# Altium PCB PCB1.PcbDoc
Units mm, origin at the board's own origin, x right, y up, seen from the top; angles counter-clockwise.
Board outline 50 x 50 mm, 2 copper layers (Top Layer, Bottom Layer); 11 components, 10 nets, 36 pads, 0 vias.
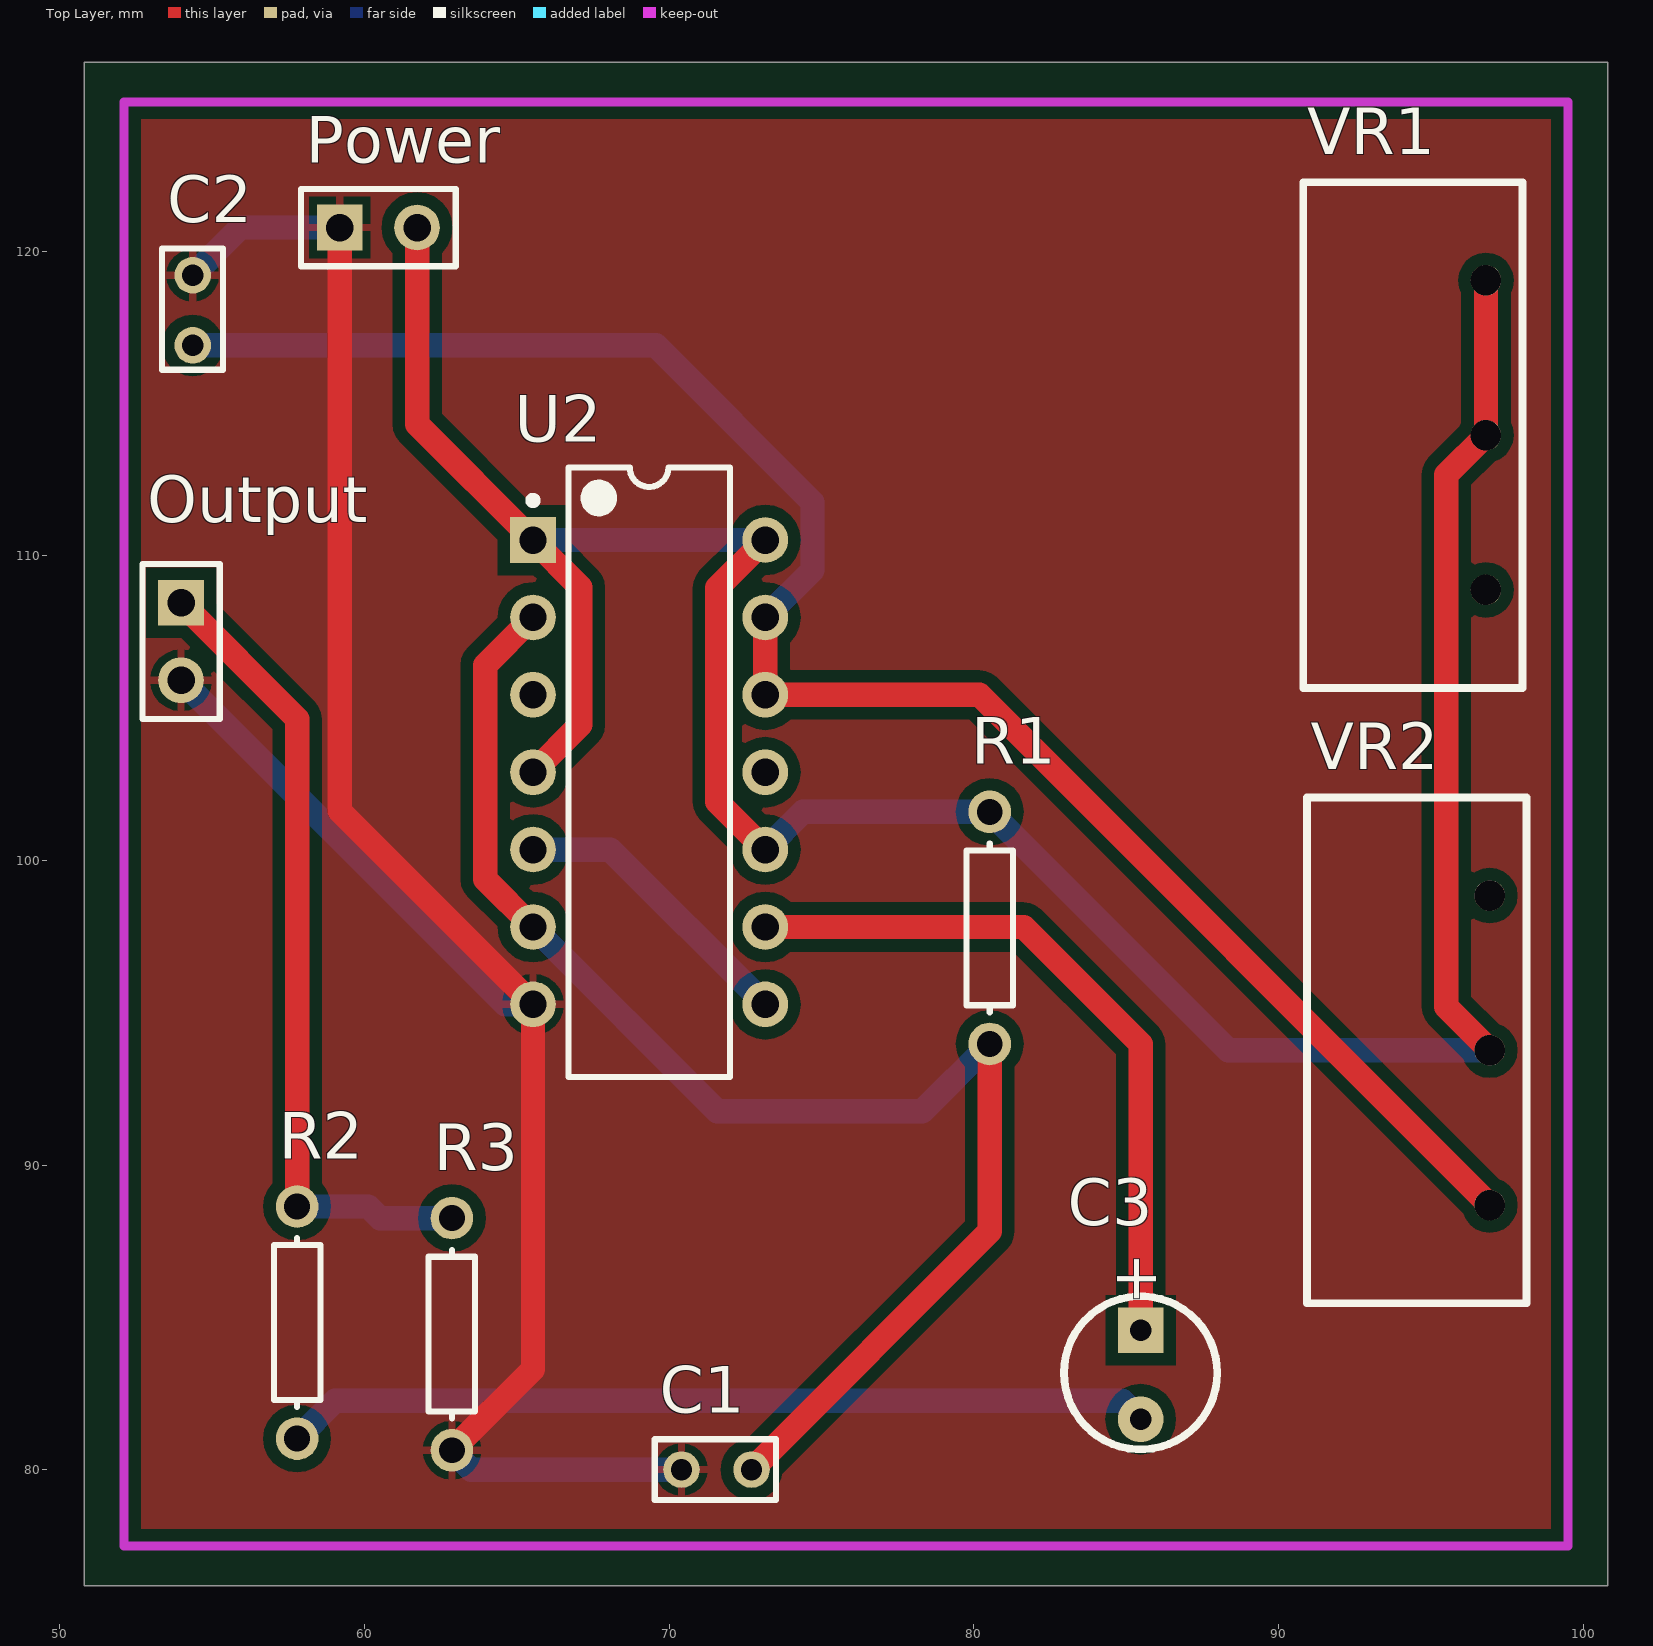
[diagram p0: Top Layer view]
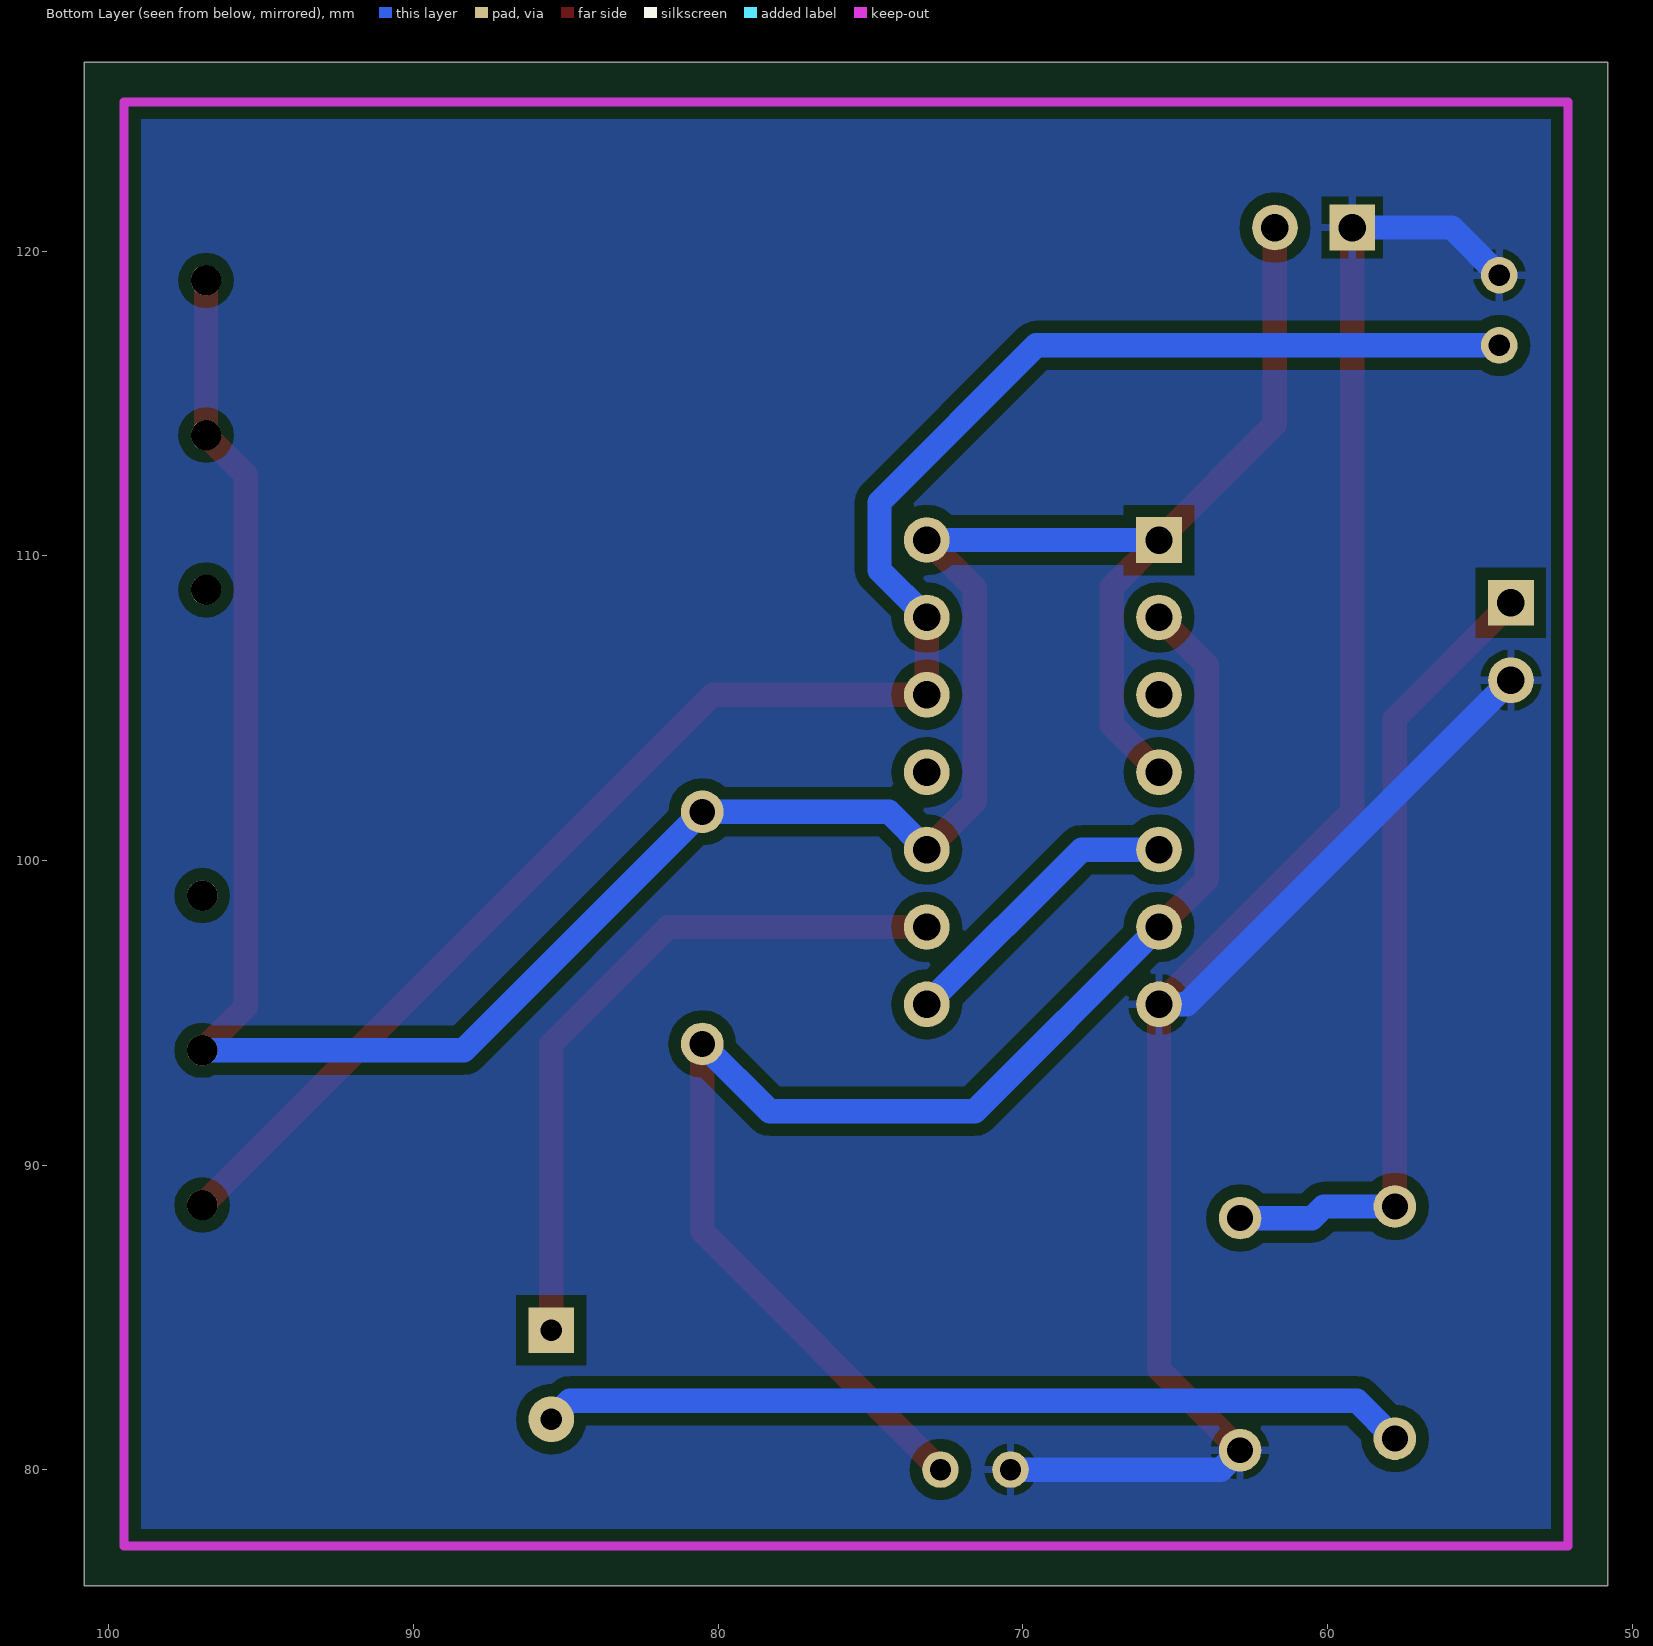
[diagram p1: Bottom Layer view, seen from below]

## Layer stack, top to bottom
Top Solder: solder mask 0.0102, Solder Resist, Dk 3.5
Top Layer: signal copper 0.0356
Dielectric 1: dielectric 0.32, FR-4, Dk 4.8
Bottom Layer: signal copper 0.0356
Bottom Solder: solder mask 0.0102, Solder Resist, Dk 3.5

## Board outline
50.8,76.2 100.8,76.2 100.8,126.2 50.8,126.2

## Design rules (kind name [scope] priority, off if disabled: settings)
Clearance [All] p1: gap=0.4
PolygonConnect [All] p1: connectstyle=Relief reliefconductorwidth=0.254 reliefentries=4 polygonreliefangle="90 Angle" airgapwidth=0.254
RoutingVias [All] p1: holewidth=0.6 width=1 viastyle="Through Hole" minholewidth=0.711 minwidth=1.27 maxholewidth=0.711 maxwidth=1.27
SolderMaskExpansion [All] p1: expansion=0.102
Width [All] p1: maxlimit=0.8 minlimit=0.8 preferedwidth=0.8
30 further rules are at their usual default settings.

## Components (designator, comment, footprint, x,y, rotation, side; value= is the part's Value field where it differs from the comment)
C1 "" "Cap ceramico 4mm" 71.501,80.01 r0 top
C2 "" "Cap ceramico 4mm" 54.356,118.11 r270 top
C3 "" "Capacitor elec 5MM (3PP)" 85.471,83.185 r270 top
Output "" HDR1X2 53.975,108.458 r270 top
Power "" HDR1X2 59.182,120.777 r0 top
R1 "" AXIAL-0.3 80.518,97.79 r90 top
R2 "" AXIAL-0.3 57.785,84.836 r90 top
R3 "" AXIAL-0.3 62.865,84.455 r90 top
U2 "CD4013" DIP14 69.342,102.87 r0 top
VR1 "" "Pot metal slanted" 90.805,105.664 r90 top
VR2 "" "Pot metal slanted" 90.932,85.471 r90 top

## Footprints (in the part's own frame and the unit in brackets; to place one, negate y for a bottom-side part, rotate by r counter-clockwise, add the part's x,y. Pads: shape width x height; smd on the part's side, far side on the other; paste and mask are expansions set on the pad)
AXIAL-0.3 [mm] "Axial Device, Thru-Hole; 2 Leads; 0.3 in Pin Spacing"
  round 1.4 hole 0.85: 1(-3.81,0) 2(3.81,0)
  silkscreen extent -2.77,-0.76 2.77,0.76
"Cap ceramico 4mm" [mm]
  round 1.2 hole 0.7: 1(-1.1,0) 2(1.2,0)
  silkscreen extent -1.98,-1 2,1
"Capacitor elec 5MM (3PP)" [mm]
  rect 1.5x1.5 hole 0.7: 1(-1.397,0)
  round 1.5 hole 0.7: 2(1.524,0)
  silkscreen extent -2.51,-2.51 2.51,2.51
DIP14 [mm]
  rect 1.5x1.5 hole 0.9: 1(-3.815,7.65)
  round 1.5 hole 0.9: 2(-3.815,5.11) 3(-3.815,2.57) 4(-3.815,0.03) 5(-3.815,-2.51) 6(-3.815,-5.05) 7(-3.815,-7.59) 8(3.805,-7.59) 9(3.805,-5.05) 10(3.805,-2.51) 11(3.805,0.03) 12(3.805,2.57) 13(3.805,5.11) 14(3.805,7.65)
  silkscreen extent -3.94,-9.97 2.65,10.03, body extent -3.3,-9.97 3.29,10.03, height 4.8
HDR1X2 [mm] "Connector; Header; 2 Position"
  rect 1.5x1.5 hole 0.9: 1(0,0)
  round 1.5 hole 0.9: 2(2.54,0)
  silkscreen extent -1.27,-1.27 3.81,1.27
"Pot metal slanted" [mm]
  round 1 hole 1: 1(3.22,-6) 2(8.3,-6) 3(13.38,-6)
  silkscreen extent 0,-7.2 16.6,0, body extent -0.17,-23.2 16.77,0, height 19.18

## Part data
C1 C2: library part Capacitor
C3: library part "Capacitor Electrolytic"
Output Power: library part "Header 2", "Header, 2-Pin"
R1 R2 R3: library part Res1, "Resistor"
U2: "Dual D Flip-flop"
VR1 VR2: library part "Rotary Potentiometer", "Rotary Potentiometer"

## Nets (pads, with @x,y where several pads share a name; then routed paths per layer and width w, separated by ;. In a path a pad name is that pad's centre, name@x,y a point inside that pad or via, vN(x,y) a via of type N, cw(c..) or ccw(c..) an arc to the next point about the centre after c; other vN are vias at no path point)
GND: C1.1 C2.1 Output.2 Power.1 R3.1 U2.7 | length 73.1
  Top Layer w0.8: Power.1 59.182,101.625 U2.7 65.527,83.307 R3.1
  Bottom Layer w0.8: Output.2 64.613,95.28 U2.7 ; C2.1 55.923,120.777 Power.1 ; R3.1 63.5,80.01 C1.1
NetC1_2: C1.2 R1.1 U2.2 U2.6 | length 47.1
  Top Layer w0.8: U2.6 63.957,99.39 63.957,106.41 U2.2 ; C1.2 80.518,87.827 R1.1
  Bottom Layer w0.8: U2.6 71.577,91.77 78.308,91.77 R1.1
NetC2_2: C2.2 U2.12 U2.13 VR2.1 | length 60.2
  Top Layer w0.8: U2.13 U2.12 80.183,105.44 VR2.1
  Bottom Layer w0.8: C2.2 69.551,116.91 74.701,111.76 74.701,109.534 U2.13
NetC3_1: C3.1 U2.9 | length 23.3
  Top Layer w0.8: U2.9 81.631,97.82 85.471,93.98 C3.1
NetC3_2: C3.2 R2.1 | length 28.5
  Bottom Layer w0.8: R2.1 59.03,82.271 84.861,82.271 C3.2
NetOutput_1: Output.1 R2.2 R3.2 | length 26.6
  Top Layer w0.8: Output.1 57.785,104.648 R2.2
  Bottom Layer w0.8: R2.2 60.122,88.646 60.503,88.265 R3.2
NetPower_2: Power.2 R1.2 U2.1 U2.4 U2.10 U2.14 VR1.2 VR1.3 VR2.2 | length 93.8
  Top Layer w0.8: Power.2 61.722,114.325 U2.1 67.081,108.966 67.081,104.454 U2.4 ; U2.10 71.577,101.93 71.577,108.95 U2.14 ; VR1.3 VR1.2 95.504,112.663 95.504,95.199 VR2.2
  Bottom Layer w0.8: U2.1 U2.14 ; U2.10 74.387,101.6 R1.2 88.347,93.771 VR2.2
NetU2_3: U2.3
NetU2_5: U2.5 U2.8 | length 9.7
  Bottom Layer w0.8: U2.5 68.067,100.36 U2.8
NetU2_11: U2.11
pads on no net: VR1.1 VR2.3

## Polygon pours and split planes (outlines as drawn)
GND on Top Layer "Top Layer" (solid, remove dead copper, pour order 0): 50.8,76.2 100.8,76.2 100.8,126.2 50.8,126.2
GND on Bottom Layer "Bottom Layer" (solid, remove dead copper, pour order 1): 50.8,76.2 100.8,76.2 100.8,126.2 50.8,126.2

## Keep-outs
Keep-Out Layer:
  lines w0.3: 52.1,77.5 52.1,124.9 99.5,124.9 99.5,77.5 52.1,77.5

## Silkscreen, mask and mechanical layers (free items; w line width, h text height)
Drill Drawing:
  text ".LEGEND" at 105.88,81.28 h1.52
  text "Drill Drawing." at 105.88,78.74 h1.52

## Dimensions
52.1,77.5 to 52.1,124.9 on Mechanical 1
52.1,77.5 to 99.5,77.5 on Mechanical 1

## Text inside footprints (layer, text, board x,y; h text height)
C3: Top Overlay "+" at 84.709,87.122 h1.5 r270